# Altium PCB BeagleBone_RF_Cape_Rev_02.PcbDoc (part 1 of 2)
Units mil, origin at the board's own origin, x right, y up, seen from the top; angles counter-clockwise.
Board outline 3400 x 2150 mil, 4 copper layers (Top Layer, GND_PLANE, Mid-Layer 1, Bottom Layer), stack 61.6 mil thick; 114 components, 115 nets, 440 pads, 227 vias.
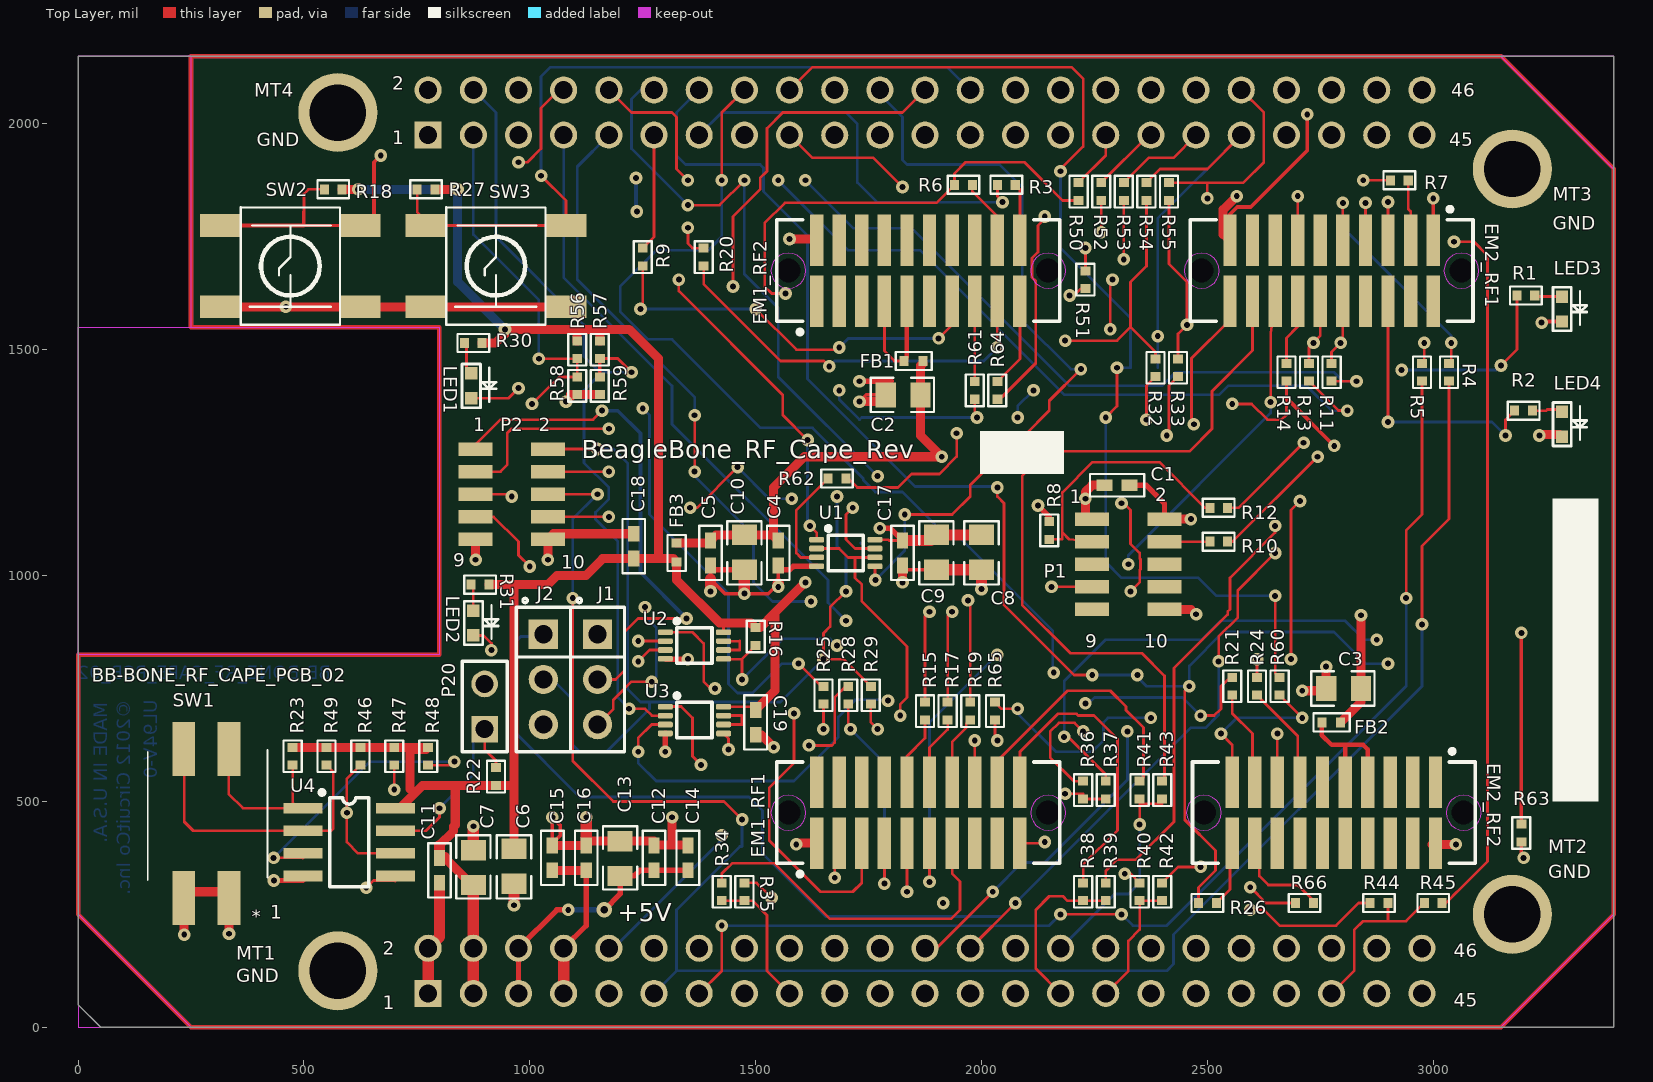
[diagram p0: Top Layer view]
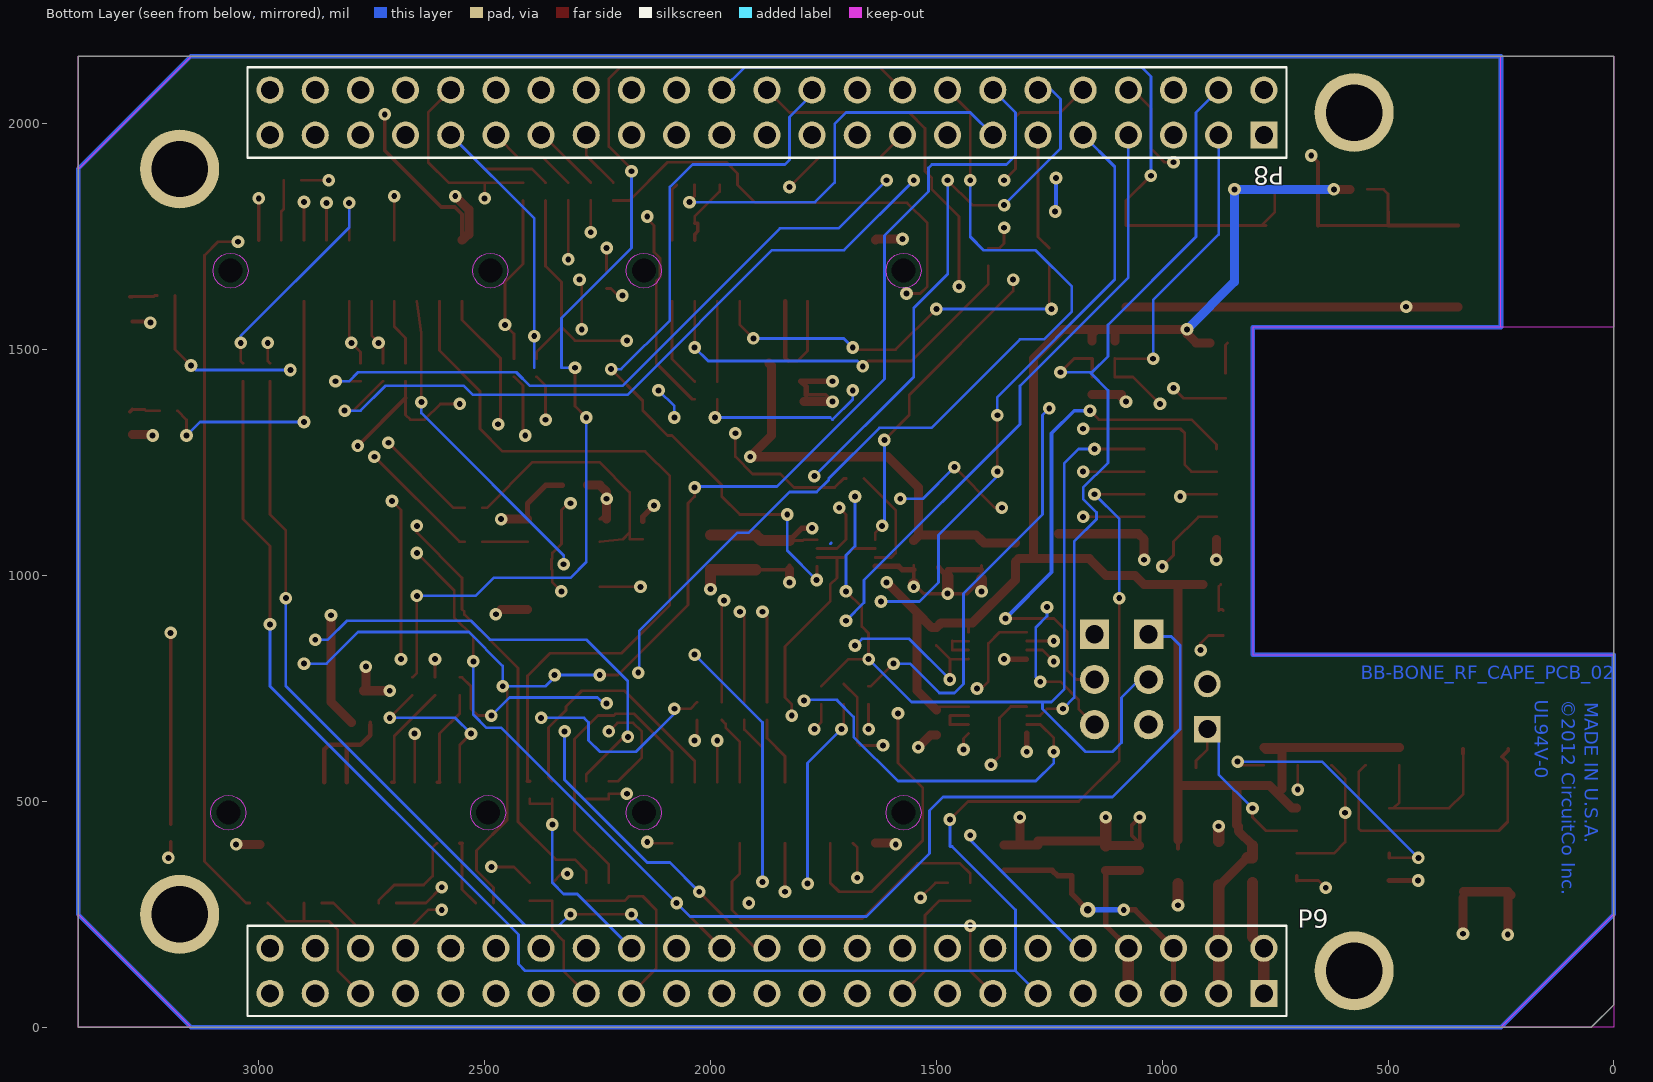
[diagram p1: Bottom Layer view, seen from below]
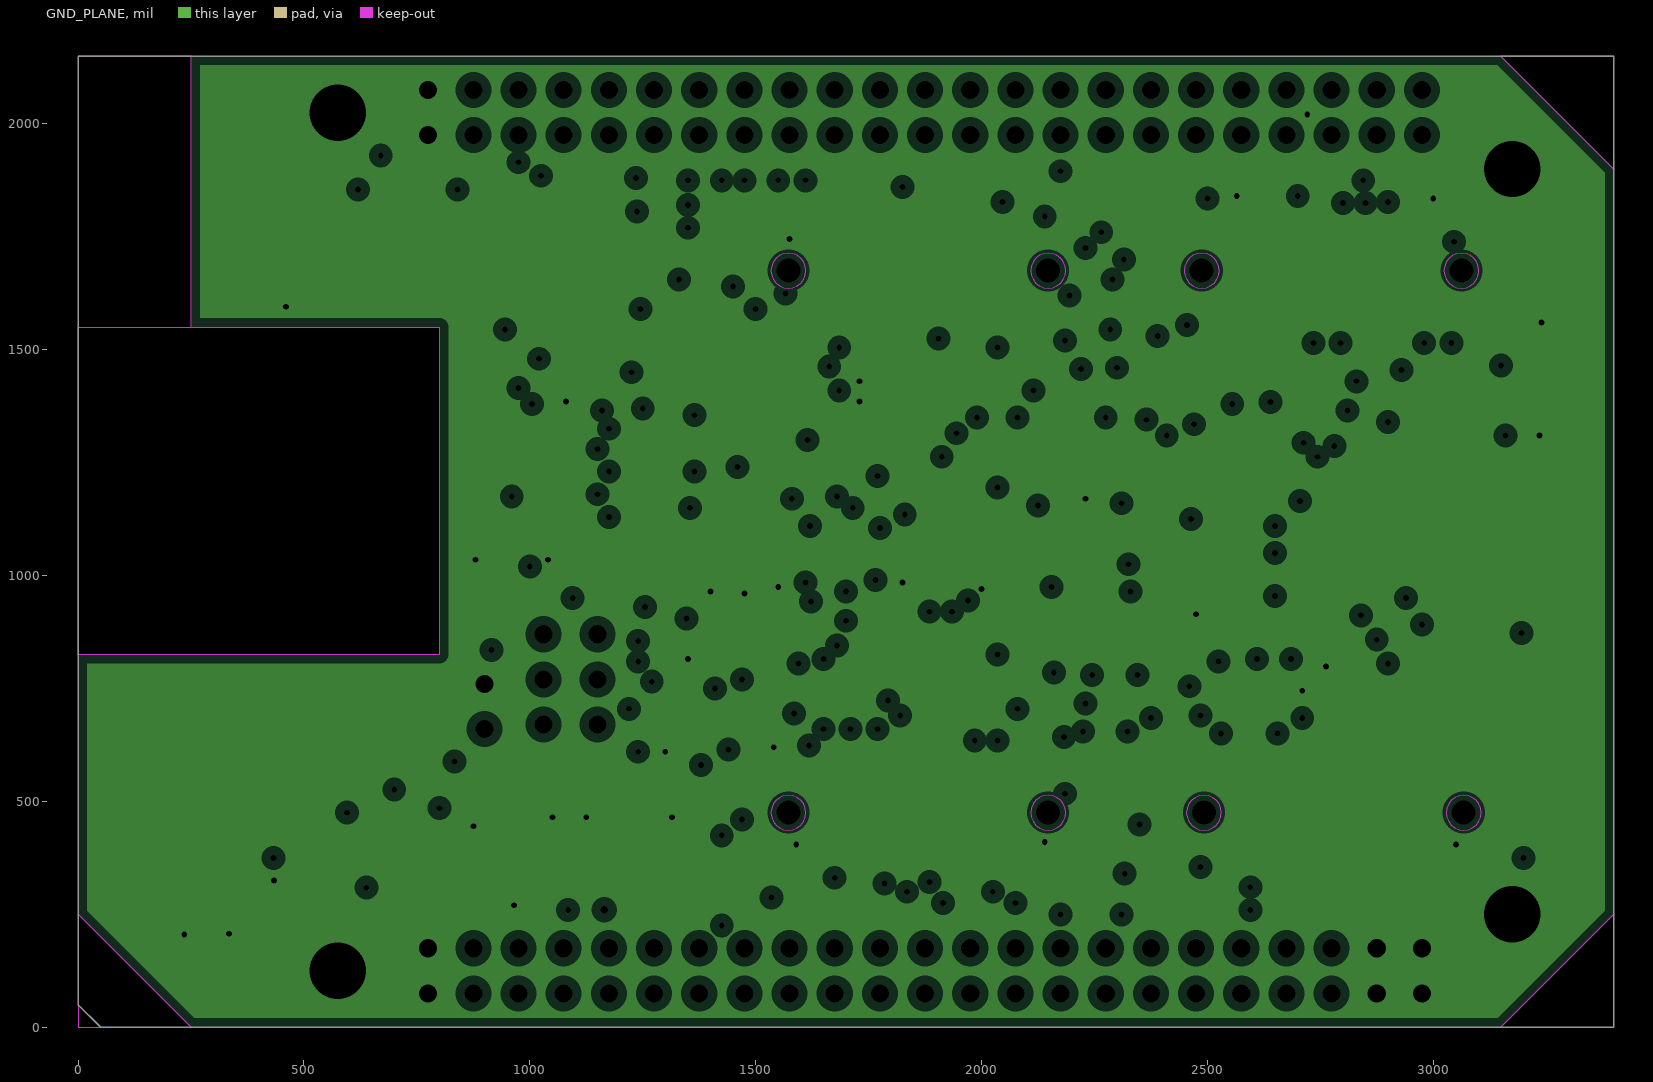
[diagram p2: GND_PLANE, clearances drawn from the general rule]
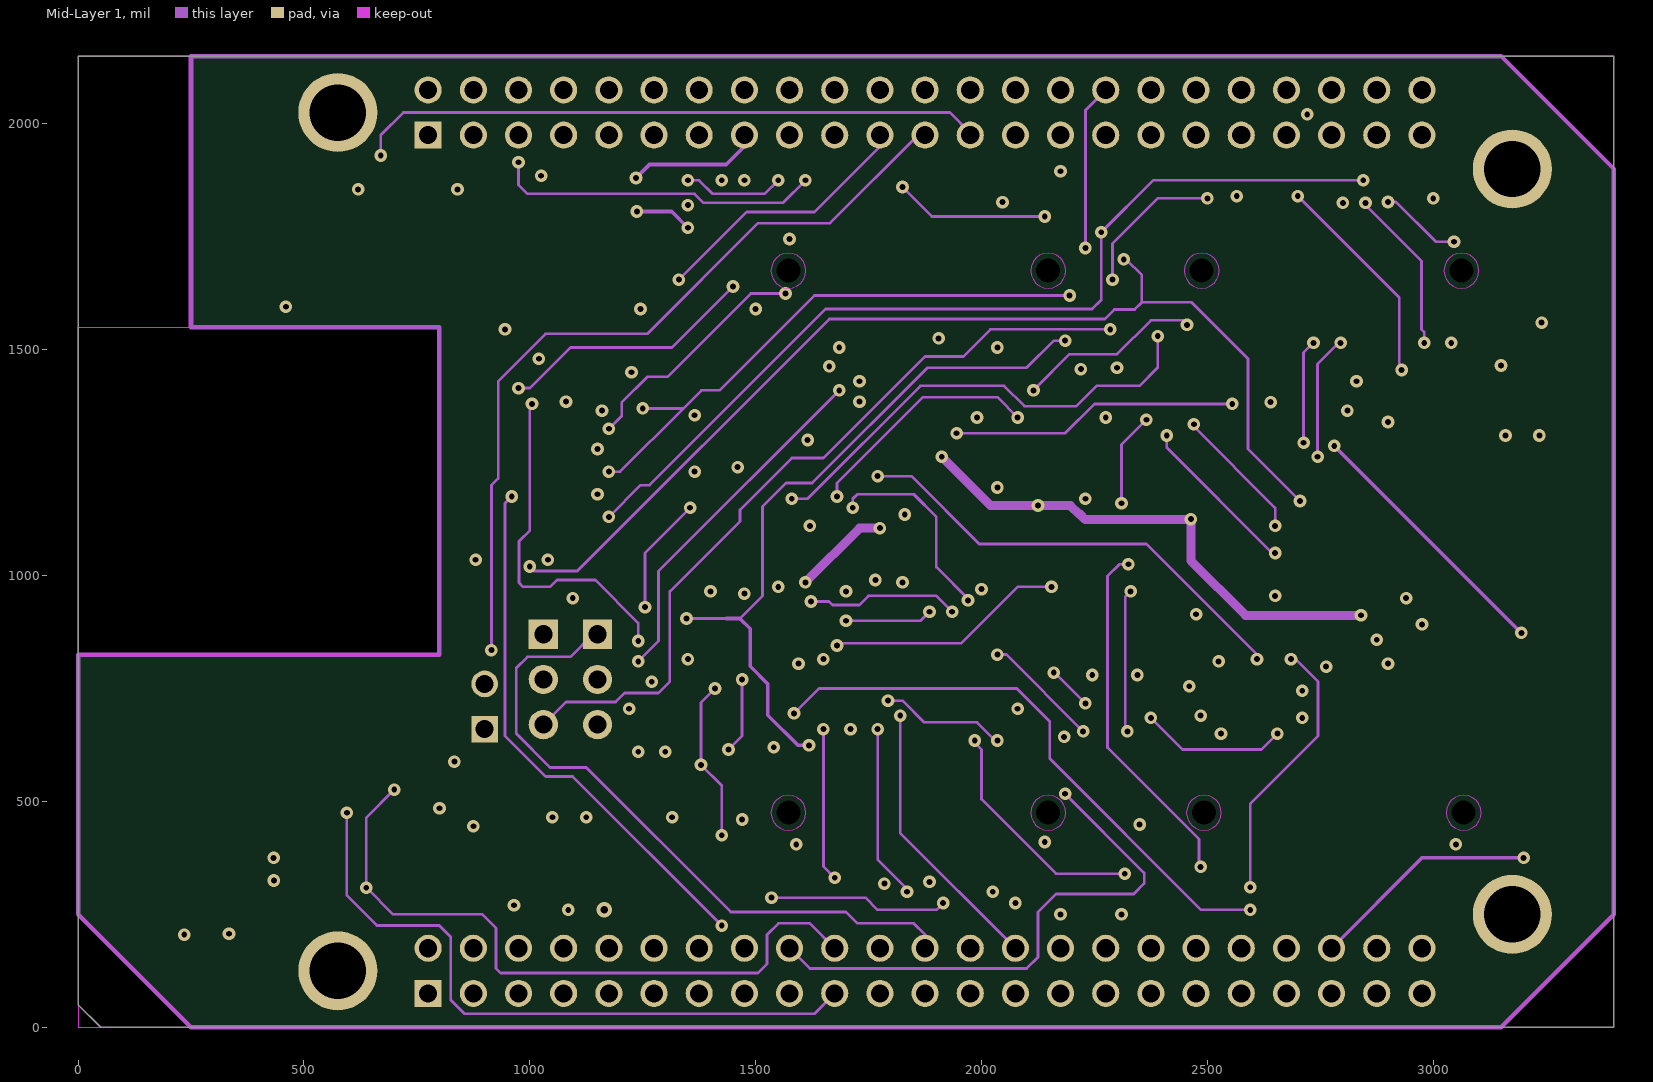
[diagram p3: Mid-Layer 1]

## Layer stack, top to bottom
Top Layer: signal copper 1.4
Dielectric: prepreg 18, FR-4, Dk 4.8
GND_PLANE: plane copper 1.4, net DGND
Dielectric: prepreg 20, FR-4, Dk 4.8
Mid-Layer 1: signal copper 1.4
Dielectric: core 18, FR-4, Dk 4.8
Bottom Layer: signal copper 1.4

## Board outline
0,2150 3400,2150 3400,0 50,0 0,50 0,2150
cut-out: 0,2150 0,1550 250,1550 250,2150
cut-out: 3400,2150 3150,2150 3400,1900
cut-out: 3400,0 3400,250 3150,0
cut-out: 0,0 250,0 0,250
cut-out: 0,1550 800,1550 800,825 0,825

## Design rules (kind name [scope] priority, off if disabled: settings)
Clearance [All] p1: gap=6
FanoutControl Fanout_SMT [IsSMTComponent] p1: bgadir=Out bgaviamode=Closest fanoutstyle=Rows fanoutdirection=OutOnly viagrid=1 // Fanout_BGA (Default Rule)
HoleSize [All] p1: absolutevalues=TRUE maxlimit=200 minlimit=10 maxpercent=80.000 minpercent=20.000
MinimumSolderMaskSliver [All] p1: minsoldermaskwidth=1
NetAntennae [All] p1: netantennaetolerance=5
PlaneClearance [All] p1: clearance=20
PlaneConnect [All] p1: planeconnectstyle=Direct reliefexpansion=20 reliefentries=4 reliefconductorwidth=10 reliefairgap=10
PolygonConnect [All] p1: connectstyle=Relief reliefconductorwidth=10 reliefentries=4 polygonreliefangle="90 Angle" airgapwidth=10
RoutingVias [All] p1: holewidth=13 width=28 viastyle="Through Hole" minholewidth=12 minwidth=24 maxholewidth=32 maxwidth=50
SilkToSilkClearance [All] p1: silktosilkclearance=0
SilkscreenOverComponentPads [All] p1: minsilkscreentomaskgap=0
SolderMaskExpansion [All] p1: expansion=4
Width [All] p1: maxlimit=50 minlimit=6 preferedwidth=8
20 further rules are at their usual default settings.

## Components (designator, comment, footprint, x,y, rotation, side; value= is the part's Value field where it differs from the comment)
C1 "10% X5R 0402" CC0402 2300,1200 r0 top
C2 "10V, X5R, 0805" CC0805 1825,1400 r180 top
C3 "10V, X5R, 0805" CC0805 2800,750 r180 top
C4 "10% X5R 0402" CC0402 1550,1050 r270 top
C5 "10% X5R 0402" CC0402 1400,1050 r270 top
C6 "10V, X5R, 0805" CC0805 965,355 r270 top
C7 "10V, X5R, 0805" CC0805 875,355 r90 top
C8 "10V, X5R, 0805" CC0805 2000,1050 r270 top
C9 "10V, X5R, 0805" CC0805 1900,1050 r270 top
C10 "10V, X5R, 0805" CC0805 1475,1050 r270 top
C11 "10% X5R 0402" CC0402 800,347.44 r270 top
C12 "10% X5R 0402" CC0402 1275,375 r90 top
C13 "10V, X5R, 0805" CC0805 1200,375 r90 top
C14 "10% X5R 0402" CC0402 1350,375 r90 top
C15 "10% X5R 0402" CC0402 1050,375 r90 top
C16 "10% X5R 0402" CC0402 1125,375 r90 top
C17 "10% X5R 0402" CC0402 1825,1050 r270 top
C18 "10% X5R 0402" CC0402 1230,1065 r90 top
C19 "10% X5R 0402" CC0402 1500,675 r270 top
EM1_RF1 "20POS 1.27MM GLD SMD" TFM-110-02-X-D-A 1860,475 r0 top locked
EM1_RF2 "20POS 1.27MM GLD SMD" TFM-110-02-X-D-A 1860,1675 r0 top locked
EM2_RF1 "20POS 1.27MM GLD SMD" TFM-110-02-X-D-A 2775,1675 r180 top locked
EM2_RF2 "20POS 1.27MM GLD SMD" TFM-110-02-X-D-A 2780,475 r180 top locked
FB1 "0402, 580mOHM, 300mA" "SMT IND 0402" 1850,1475 r0 top
FB2 "0402, 580mOHM, 300mA" "SMT IND 0402" 2775,675 r0 top
FB3 "0402, 580mOHM, 300mA" "SMT IND 0402" 1325,1050 r270 top
J1 "PBC03SAAN" PBC03SAAN 1150,770 r270 top
J2 "PBC03SAAN" PBC03SAAN 1030,770 r270 top
LED1 "Blue" LED-0603 870,1420 r270 top
LED2 "Blue" LED-0603 875,895 r270 top
LED3 "Red" LED-0603 3285,1590 r270 top
LED4 "Grn" LED-0603 3285,1335 r270 top
MT1 "GND" MTGH200C125D_PL 575,125 r0 top
MT2 "GND" MTGH200C125D_PL 3175,250 r0 top locked
MT3 "GND" MTGH200C125D_PL 3175,1900 r0 top locked
MT4 "GND" MTGH200C125D_PL 575,2025 r0 top
P1 "CC Debug" HEADER10P 2325,1025 r0 top
P2 "UARTS" HEADER10P 960,1180 r0 top
P8 "X23P .1  240/110 30AU" "HEADER23X2 - BOT_MOUNT" 1875,2025 r0 bottom locked
P9 "X23P .1  240/110 30AU" "HEADER23X2 - BOT_MOUNT" 1875,125 r0 bottom locked
P20 "Header 2" HDR1X2 900,660 r90 top
R1 "1/10W 1% 0402 SMD" RESC0402 3205,1620 r0 top
R2 "1/10W 1% 0402 SMD" RESC0402 3200,1365 r0 top
R3 "0402 Chip Res 5%" RESC0402 2055,1865 r180 top
R4 "0402 Chip Res 5%" RESC0402 3035,1450 r90 top
R5 "0402 Chip Res 5%" RESC0402 2975,1450 r90 top
R6 "0402 Chip Res 5%" RESC0402 1960,1865 r180 top
R7 "0402 Chip Res 5%" RESC0402 2925,1875 r0 top
R8 "1/10W 1% 0402 SMD" RESC0402 2150,1100 r270 top
R9 "0402 Chip Res 5%" RESC0402 1250,1705 r90 top
R10 "0402 Chip Res 5%" RESC0402 2525,1075 r180 top
R11 "0402 Chip Res 5%" RESC0402 2775,1450 r90 top
R12 "0402 Chip Res 5%" RESC0402 2525,1150 r180 top
R13 "0402 Chip Res 5%" RESC0402 2725,1450 r90 top
R14 "0402 Chip Res 5%" RESC0402 2675,1450 r90 top
R15 "0402 Chip Res 5%" RESC0402 1875,700 r90 top
R16 "1/10W 1% 0402 SMD" RESC0402 1500,865 r270 top
R17 "0402 Chip Res 5%" RESC0402 1925,700 r90 top
R18 "1/10W 1% 0402 SMD" RESC0402 565,1855 r0 top
R19 "0402 Chip Res 5%" RESC0402 1975,700 r90 top
R20 "0402 Chip Res 5%" RESC0402 1385,1705 r90 top
R21 "0402 Chip Res 5%" RESC0402 2555,755 r90 top
R22 "1/10W 1% 0402 SMD" RESC0402 925,555 r90 top
R23 "1/10W 1% 0402 SMD" RESC0402 475,600 r270 top
R24 "0402 Chip Res 5%" RESC0402 2610,755 r90 top
R25 "0402 Chip Res 5%" RESC0402 1650,735 r90 top
R26 "0402 Chip Res 5%" RESC0402 2500,275 r180 top
R27 "1/10W 1% 0402 SMD" RESC0402 770.32,1855 r0 top
R28 "0402 Chip Res 5%" RESC0402 1705,735 r90 top
R29 "0402 Chip Res 5%" RESC0402 1755,735 r90 top
R30 "1/10W 1% 0402 SMD" RESC0402 875,1515 r180 top
R31 "1/10W 1% 0402 SMD" RESC0402 890,980 r180 top
R32 "0402 Chip Res 5%" RESC0402 2385,1460 r270 top
R33 "0402 Chip Res 5%" RESC0402 2435,1460 r270 top
R34 "0402 Chip Res 5%" RESC0402 1425,300 r90 top
R35 "0402 Chip Res 5%" RESC0402 1475,300 r90 top
R36 "0402 Chip Res 5%" RESC0402 2225,525 r270 top
R37 "0402 Chip Res 5%" RESC0402 2275,525 r270 top
R38 "0402 Chip Res 5%" RESC0402 2225,300 r90 top
R39 "0402 Chip Res 5%" RESC0402 2275,300 r90 top
R40 "0402 Chip Res 5%" RESC0402 2350,300 r90 top
R41 "0402 Chip Res 5%" RESC0402 2350,525 r270 top
R42 "0402 Chip Res 5%" RESC0402 2400,300 r90 top
R43 "0402 Chip Res 5%" RESC0402 2400,525 r270 top
R44 "0402 Chip Res 5%" RESC0402 2880,275 r180 top
R45 "0402 Chip Res 5%" RESC0402 3000,275 r0 top
R46 "1/10W 1% 0402 SMD" RESC0402 625,600 r270 top
R47 "1/10W 1% 0402 SMD" RESC0402 700,600 r270 top
R48 "1/10W 1% 0402 SMD" RESC0402 775,600 r270 top
R49 "1/10W 1% 0402 SMD" RESC0402 550,600 r270 top
R50 "0402 Chip Res 5%" RESC0402 2215,1850 r270 top
R51 "0402 Chip Res 5%" RESC0402 2230,1655 r90 top
R52 "0402 Chip Res 5%" RESC0402 2265,1850 r270 top
R53 "0402 Chip Res 5%" RESC0402 2315,1850 r270 top
R54 "0402 Chip Res 5%" RESC0402 2365,1850 r270 top
R55 "0402 Chip Res 5%" RESC0402 2415,1850 r90 top
R56 "1/10W 1% 0402 SMD" RESC0402 1105,1500 r270 top
R57 "1/10W 1% 0402 SMD" RESC0402 1155,1500 r270 top
R58 "1/10W 1% 0402 SMD" RESC0402 1105,1420 r90 top
R59 "1/10W 1% 0402 SMD" RESC0402 1155,1420 r270 top
R60 "0402 Chip Res 5%" RESC0402 2660,755 r90 top
R61 "0402 Chip Res 5%" RESC0402 1985,1410 r270 top
R62 "0402 Chip Res 5%" RESC0402 1680,1215 r180 top
R63 "0402 Chip Res 5%" RESC0402 3195,430 r270 top
R64 "0402 Chip Res 5%" RESC0402 2035,1410 r270 top
R65 "0402 Chip Res 5%" RESC0402 2030,700 r270 top
R66 "0402 Chip Res 5%" RESC0402 2715,275 r180 top
SW1 "for I2C Address Selection on EEPROM" SM_CRY_SCC18 284.21,450.98 r180 top
SW2 "B3S-1100" SWITCH-OMRON-B3S-1000 470,1685 r180 top
SW3 "B3S-1100" SWITCH-OMRON-B3S-1000 925,1685 r180 top
U1 "GATE POS-AND DCU8" DCU-8 1700,1050 r270 top
U2 "GATE POS-AND DCU8" DCU-8 1365,845 r270 top
U3 "GATE POS-AND DCU8" DCU-8 1365,680 r270 top
U4 "56KBIT 400KHZ 8SOIC" SO8 600,410 r270 top

## Footprints (in the part's own frame and the unit in brackets; to place one, negate y for a bottom-side part, rotate by r counter-clockwise, add the part's x,y. Pads: shape width x height; smd on the part's side, far side on the other; paste and mask are expansions set on the pad)
CC0402 [mil] "Chip Capacitor, Body 1.0x0.5mm, IPC Low Density"
  rect 35x25 smd: 1(-27.56,0) 2(27.56,0)
  silkscreen extent -60,-25 60,25, body extent -22,-12 22,12, height 10
CC0805 [mil]
  rect 45x55 smd: 1(-40,0) 2(37,0)
  silkscreen extent -70,-38 70,38, body extent -45,-20 40,20, height 20
DCU-8 [mil] "Dual Little Logic"
  rrect50% 12.5x33 smd mask+1.5: 1(-29.53,-64.96) 2(-9.84,-64.96) 3(9.84,-64.96) 4(29.53,-64.96) 5(29.53,63.98) 6(9.84,63.98) 7(-9.84,63.98) 8(-29.53,63.98)
  silkscreen extent -59,-44 39,38, body extent -40,-42 40,43, height 40
HDR1X2 [mm] "Connector; Header; 2 Position"
  rect 1.5x1.5 hole 1.016: 1(0,0)
  round 1.5 hole 1.016: 2(2.54,0)
  silkscreen extent -1.27,-1.27 3.81,1.27
HEADER10P [mil] "CC Debugg 0.50LS Dual Row"
  rect 75x30 smd: 1(-80,100) 2(80,100) 3(-80,50) 4(80,50) 5(-80,0) 6(80,0) 7(-80,-50) 8(80,-50) 9(-80,-100) 10(80,-100)
  body extent -40,-125 40,125, height 200
"HEADER23X2 - BOT_MOUNT" [mil] "HEADER23X2"
  rect 60x60 hole 40: 1(-1100,50)
  round 60 hole 40: 2(-1100,-50) 3(-1000,50) 4(-1000,-50) 5(-900,50) 6(-900,-50) 7(-800,50) 8(-800,-50) 9(-700,50) 10(-700,-50) 11(-600,50) 12(-600,-50) 13(-500,50) 14(-500,-50) 15(-400,50) 16(-400,-50) 17(-300,50) 18(-300,-50) 19(-200,50) 20(-200,-50) 21(-100,50) 22(-100,-50) 23(0,50) 24(0,-50) 25(100,50) 26(100,-50) 27(200,50) 28(200,-50) 29(300,50) 30(300,-50) 31(400,50) 32(400,-50) 33(500,50) 34(500,-50) 35(600,50) 36(600,-50) 37(700,50) 38(700,-50) 39(800,50) 40(800,-50) 41(900,50) 42(900,-50) 43(1000,50) 44(1000,-50) 45(1100,50) 46(1100,-50)
  silkscreen extent -1150,-100 1150,100, body extent -1150,-100 1150,100, height 330
LED-0603 [mm]
  rect 0.7x0.7 smd: A(-0.7,0) K(0.7,0)
  silkscreen extent -1.22,-0.51 1.22,1.4, body extent -0.76,-0.38 0.76,0.38, height 0.76
MTGH200C125D_PL [mil]
  round 175 hole 125: 1(0,0)
PBC03SAAN [mm] "Sullins 100mil, 1x3, 230 mil above insulator"
  rect 1.65x1.65 hole 1.016: 1(-2.54,0)
  round 1.65 hole 1.016: 2(0,0) 3(2.54,0)
  silkscreen extent -4.57,-1.52 4.06,1.52, body extent -3.81,-1.27 3.81,1.27, height 8.38
RESC0402 [mil] "Chip Resistor, Body 1.1x0.5mm, IPC High Density"
  rect 20x22 smd: 1(-19.68,0) 2(19.69,0)
  silkscreen extent -35,-20 35,20, body extent -20,-10 20,10, height 10
SM_CRY_SCC18 [mil]
  rect 50x120 smd: 1(-50,165) 2(50,165) 3(50,-165) 4(-50,-165)
  silkscreen extent -135,-163 130,125, body extent -130,-125 130,115, height 162
"SMT IND 0402" [mil] "Chip Inductor, Body 1.0x0.5mm, IPC Medium Density"
  rect 20x22 smd: 1(-21.65,0) 2(20,0)
  silkscreen extent -40,-20 40,20, body extent -20,-10 20,10, height 10
SO8 [mm] "Small Outline; 8 Leads; Body Width 3.9 mm; Pitch 1.27 mm"
  rect 0.6x2.2 smd: 1(-1.905,-2.6) 2(-0.635,-2.6) 3(0.635,-2.6) 4(1.905,-2.6) 5(1.905,2.6) 6(0.635,2.6) 7(-0.635,2.6) 8(-1.905,2.6)
  silkscreen extent -2.92,-1.65 2.5,1.1, body extent -2.54,-1.27 2.54,1.27, height 0.76
SWITCH-OMRON-B3S-1000 [mil]
  rect 90x50 smd: 1(155,-90) 2(-155,-90) 3(155,90) 4(-155,90)
  silkscreen extent -110,-131 110,130, body extent -115,-135 115,135, height 79
TFM-110-02-X-D-A [mm] "1.27mm pitch, 20 pin, terminal strip; w/alignment pins, SMT"
  rect 0.75x2.9 smd mask+0: 1(-5.715,-1.714) 2(-5.715,1.714) 3(-4.445,-1.714) 4(-4.445,1.714) 5(-3.175,-1.714) 6(-3.175,1.714) 7(-1.905,-1.714) 8(-1.905,1.714) 9(-0.635,-1.714) 10(-0.635,1.714) 11(0.635,-1.714) 12(0.635,1.714) 13(1.905,-1.714) 14(1.905,1.714) 15(3.175,-1.714) 16(3.175,1.714) 17(4.445,-1.714) 18(4.445,1.714) 19(5.715,-1.714) 20(5.715,1.714)
  round 1 hole 1.35 unplated mask+0: 21(-7.302,0) 22(7.302,0)
  Keep-Out Layer pour cut-out: 8.286,0 8.253,0.255 8.154,0.492 7.998,0.695 7.794,0.852 7.557,0.95 7.303,0.983 7.048,0.95 6.811,0.852 6.607,0.695 6.451,0.492 6.353,0.255 6.319,0 6.353,-0.255 6.451,-0.492 6.607,-0.695 6.811,-0.852 7.048,-0.95 7.303,-0.983 7.557,-0.95 7.794,-0.852 7.998,-0.695 8.154,-0.492 8.253,-0.255
  Keep-Out Layer pour cut-out: -6.319,0 -6.353,0.255 -6.451,0.492 -6.607,0.695 -6.811,0.852 -7.048,0.95 -7.303,0.983 -7.557,0.95 -7.794,0.852 -7.998,0.695 -8.154,0.492 -8.253,0.255 -8.286,0 -8.253,-0.255 -8.154,-0.492 -7.998,-0.695 -7.794,-0.852 -7.557,-0.95 -7.303,-0.983 -7.048,-0.95 -6.811,-0.852 -6.607,-0.695 -6.451,-0.492 -6.353,-0.255
  silkscreen extent -7.95,-3.57 7.95,2.85, body extent -8.51,-3.68 8.51,3.68, height 6

## Part data
C1 C5 C12 C14 C15 C16 C17 C18 C19: library part LMK105BJ104KV-F, "CAP CER 0.1UF 10V 10% X5R 0402"
C2 C3 C6 C7 C8 C9 C10 C13: library part C0805C106K8PACTU, "CAP CER10UF, 10V, X5R, 0805"
C4 C11: library part LMK105BJ105KV-F, "CAP CER 1UF 10V 10% X5R 0402"
EM1_RF1 EM1_RF2 EM2_RF1 EM2_RF2: library part TFM-110-02-S-D-WT, "CONN HEADER 20POS 1.27MM GLD SMD"
FB1 FB2 FB3: library part BK1005HS102-T, "FERRITE BEAD, 0402, 580mOHM, 300mA"
J1 J2: "Header, TH, 100mil, 1x3, Gold plated, 230 mil above insulator"
LED1 LED2: library part LED-BLU-0603, "SMT LED 0603"
LED3: library part LED-RED-0603, "SMT LED 0603"
LED4: library part LED-GRN-0603, "SMT LED 0603"
MT1 MT2 MT3 MT4: library part MT_1P, "1P .125DIA"
P1 P2: library part "SMT Header 5x2", "SMT Header, 10-Pin, .050LS Dual row"
P8 P9: library part 10-89-7460, "Headers & Wire Housings HDR VT 2X23P .1  240/110 30AU"
P20: "Header, 2-Pin"
R1 R2 R30 R31: library part ERJ-2GEJ221X, "RES 220 OHM 1/10W 1% 0402 SMD"
R3 R4 R5 R6 R7 R9 R10 R11 R12 R13 R14 R15 R17 R19 R20 R21 R24 R25 R26 R28 R29 R32 R33 R34 R35 R36 R37 R38 R39 R40 R41 R42 R43 R44 R45 R50 R51 R52 R53 R54 R55 R60 R61 R62 R63 R64 R65 R66: library part ERJ-2GE0R00X, "RES 0.0 OHM 1/10W 0402 SMD"
R8 R16 R18 R22 R23 R27 R48 R49 R56 R57 R58 R59: library part ERJ-2RKF4701X, "RES 4.70K OHM 1/10W 1% 0402 SMD"
R46 R47: library part ERJ-2RKF1501X, "RES 1.50K OHM 1/10W 1% 0402 SMD"
SW1: library part SW_DIP_2P, "SMT 2Pos Slide Dip Switch"
SW2 SW3: library part SW-PB, "Switch, Tact 6mm SMT"
U1 U2 U3: library part IC_SN74AUP2G08_0, "IC GATE POS-AND DL 2INP LP 8US8"
U4: library part CAT24C256WI-G, "IC EEPROM 256KBIT 400KHZ 8SOIC"

## Via types
v1: diameter 28, hole 13, Top Layer to Bottom Layer, 226 vias
v2: diameter 35, hole 16, Top Layer to Bottom Layer, 1 vias

## Nets (pads, with @x,y where several pads share a name; then routed paths per layer and width w, separated by ;. In a path a pad name is that pad's centre, name@x,y a point inside that pad or via, vN(x,y) a via of type N, cw(c..) or ccw(c..) an arc to the next point about the centre after c; other vN are vias at no path point)
ADC_GND: P9.34
CC_DBUGGER_RESETN: P1.7 R16.2 U2.5 U3.5 | length 1208.8
  Top Layer w6: U3.5@1428.98,650.47 1440,639.45 v1(1440,615) ; U2.5@1428.98,815.47 1429.45,815 1470,815 ; v1(1470,770) 1470,815 ; R16.2@1500,845.31 1470,815.31 1470,815 ; v1(2155,975) P1.7@2245,975
  Mid-Layer 1 w6: v1(1440,615) 1470,645 v1(1470,770) ; v1(1680,845) 1685,850 1955,850 2080,975 v1(2155,975)
  Bottom Layer w6: v1(1470,770) 1560,860 1665,860 v1(1680,845)
CLKOUT2: P9.41 R44.1 R45.1 | length 381
  Top Layer w6: P9.41@2775,75 2825,125 2825,215 2845,235 2900,235 ; R44.1@2899.69,275 2899.69,235.31 2900,235 ; R45.1@2980.32,275 2980,275 2940,235 2900,235
DGND: C1.1 C2.2 C3.2 C4.2 C5.2 C6.2 C7.2 C8.2 C9.2 C10.2 C11.2 C12.2 C13.2 C14.2 C15.2 C16.2 C17.2 C18.2 C19.2 EM1_RF1.1 EM1_RF1.19 EM1_RF2.2 EM2_RF1.1 EM2_RF1.19 EM2_RF2.2 LED3.K LED4.K MT1.1 MT2.1 MT3.1 MT4.1 P1.1 P1.10 P2.9 P2.10 P8.1 P8.2 P9.1 P9.2 P9.43 P9.44 P9.45 P9.46 P20.2 R58.1 R59.2 SW1.1 SW1.2 SW2.3 SW2.4 SW3.3 SW3.4 U1.4 U2.4 U3.4 U4.4 | length 4787.6
  Top Layer w6: C12.2@1275,402.56 1275,403 C12.2@1275,412 ; U2.4@1300.04,815.47 U2.4@1300.51,815 ; C14.2@1350,402.56 C14.2@1350,403 ; C5.2@1400,1013 C5.2@1400,1022.44 ; C4.2@1550,1013 C4.2@1550,1022.44 ; v1(1590,405) v1@1592.5,407.5 ; EM1_RF1.19@2085,407.5 2137.5,407.5 v1(2140,410) ; P1.1@2230,1125 P1.1@2245,1125 2235,1135 2235,1170 v1(2230,1170) ; EM2_RF2.2@2997.5,405 EM2_RF2.2@3000,407.5 ; v1(3235,1310) v1@3237.44,1312.44 ; v1@3237.44,1562.44 3235,1560 v1(3240,1560)
  Top Layer w8: C15.2@1050,402.56 C15.2@1050,407 ; C5.2@1400,1013 1400,992 1432,960 v1(1475,960) 1528,960 1550,982 C4.2@1550,1013 ; v1(1730,1385) 1745,1400 C2.2@1788,1400 ; C17.2@1825,1022.44 1825,1013 C9.2@1900,1013 ; EM2_RF1.19@2550,1742.5 2550,1800 2566,1816 2596,1816 2721,1941 v1(2721,2021) ; v1(2710,745) 2715,750 C3.2@2763,750 ; EM2_RF1.1@3000,1742.5 v1(3000,1835) ; v1(3240,1560) 3242.44,1562.44 LED3.K@3280,1562.44 ; C15.2@1050,407 1067,424 1067,448 v1(1050,465) C15.2@1050,407
  Top Layer w12: v1(433.33,325) U4.4@497.64,325 ; v1(1300,610) 1300,650.43 U3.4@1300.04,650.47 ; U2.4@1300.51,815 v1(1350,815) ; C5.2@1400,1013 C10.2@1475,1013 ; C10.2@1475,998 C10.2@1495,1018 ; C4.2@1550,1013 1576,1013 1583.47,1020.47 U1.4@1635.04,1020.47 ; v1(1730,1430) 1800,1430 1788,1418 C2.2@1788,1400 ; 2464.2,925 v1(2475,914.2)
  Top Layer w20: SW1.2@227.59,292.59 235,300 SW1.1@333.42,300 ; SW1.2@234.21,285.98 235,285.19 v1(235,205) ; v1(334.21,206.98) SW1.1@334.21,285.98 ; SW2.3@345,1595 SW2.4@625,1595 SW3.3@766,1595 ; SW3.3@770,1595 SW3.4@1080,1595 ; v1(880,1035) P2.9@880,1080 ; v1(1040,1035) P2.10@1040,1080 1052.56,1092.56 C18.2@1230,1092.56 ; C15.2@1050,402 C16.2@1125,402 ; v1(1080,1385) 1090,1395 1090,1400.32 R58.1@1105,1400.32 1125,1400.32 R59.2@1155,1400.31 ; C16.2@1125,412 C13.2@1200,412 C12.2@1275,412 ; C12.2@1275,403 C14.2@1350,403 ; 1315,407 v1(1315,465) ; C19.2@1500,647.44 1512.56,647.44 v1(1540,620) ; v1(1575,1745) 1632.5,1745 EM1_RF2.2@1635,1742.5 ; v1@1592.5,407.5 EM1_RF1.1@1635,407.5 ; v1(1730,1385) C2.2@1793,1385 ; v1(1825,985) C17.2@1825,1013 ; P1.1@2230,1125 v1(2230,1170) 2230,1185 2245,1200 C1.1@2272.44,1200 ; P1.10@2405,925 2464.2,925 ; EM2_RF1.19@2550,1742.5 2537.5,1755 2535,1755 2535,1810 v1(2565,1840) ; v1(2710,745) C3.2@2768,745 ; C3.2@2763,750 v1(2763,798.5) ; EM2_RF2.2@2997.5,405 v1(3050,405) ; v1@3237.44,1312.44 LED4.K@3280,1312.44 ; v1@3237.44,1562.44 v1@3242.44,1562.44
  Top Layer w25: P9.1@775,75 P9.2@775,175 800,200 C11.2@800,319.88 ; C7.2@875,412 v1(875,445) ; v1(965,270) C6.2@965,318 ; C16.2@1125,402 C16.2@1125,402.56 1125,412 v1(1125,465) ; v1(1400,965) 1400,992 ; v1(1475,960) C10.2@1475,998 ; v1(1550,975) v1@1550,982 ; C9.2@1900,1013 C8.2@2000,1013 v1(2000,970)
  Mid-Layer 1 w6: v1(2230,1170) v1@2230,1175
  other v1: 460,1595
EM1_GPIO0: P8.7 R15.2 | length 1731.6
  Top Layer w6: R15.2@1875,719.69 1875,910 v1(1885,920)
  Mid-Layer 1 w6: v1(1700,900) 1865,900 v1(1885,920)
  Bottom Layer w6: P8.7@1075,1975 1075,1660 1315,1420 1315,1335 1660,990 1660,940 v1(1700,900)
EM1_GPIO1: P8.9 R17.2 | length 1868.5
  Top Layer w6: v1(1365,1230) v1(1365,1355) ; R17.2@1925,719.69 1925,910 v1(1935,920)
  Mid-Layer 1 w6: v1(1622.5,942.5) 1662.5,942.5 1670,935 1730,935 1750,955 1900,955 v1(1935,920)
  Bottom Layer w6: P8.9@1175,1975 1105,1905 1105,1655 1365,1395 v1(1365,1355) ; v1(1365,1230) 1365,1220 1495,1090 1495,985 1537.5,942.5 v1(1622.5,942.5)
EM1_GPIO2: P8.11 R9.2 | length 260.7
  Top Layer w6: R9.2@1250,1724.69 1275,1749.69 P8.11@1275,1975
EM1_GPIO3: P8.13 R3.2 | length 896.9
  Top Layer w6: R3.2@2035.31,1865 2035.31,1839.69 2045,1830 2045,1825 v1(2046.59,1826.59)
  Bottom Layer w6: P8.13@1375,1975 1425,2025 1700,2025 1725,2000 1725,1870 1768.41,1826.59 v1(2046.59,1826.59)
EM1_GPIO4: P8.15 R20.2 | length 571
  Top Layer w6: v1(1350,1770) 1350,1735 1360.31,1724.69 R20.2@1385,1724.69
  Mid-Layer 1 w8: v1(1235,1880) 1265,1910 1435,1910 1475,1950 P8.15@1475,1975 ; v1(1237,1806) 1314,1806 v1(1350,1770)
  Bottom Layer w8: v1(1235,1880) 1235,1808 v1(1237,1806)
EM1_GPIO5: P8.17 R64.2 | length 1104.6
  Top Layer w6: P8.17@1575,1975 1625,1925 1760,1925 v1(1825,1860) ; R64.2@2035,1390.31 2040.31,1390.31 2120,1470 2120,1652.19 2111.93,1660.26 2111.93,1702.81 2125,1715.89 2125,1775 2145,1795 v1(2140,1795)
  Mid-Layer 1 w6: v1(1825,1860) 1890,1795 v1(2140,1795)
EM1_I2C_SCL: EM1_RF1.13 R34.2 | length 771.3
  Top Layer w6: R34.2@1425,319.69 1425,340 1448,363 1542,363 1665,240 1932.5,240 1952.5,260 1952.5,322.5 1935,340 EM1_RF1.13@1935,407.5
EM1_I2C_SDA: EM1_RF1.11 R36.1 | length 1152.1
  Top Layer w6: v1(1885,322) EM1_RF1.11@1885,407.5 ; R36.1@2225,544.69 2204.31,544.69 2152,597 2152,654.37 2171.63,674 2206,674 v1(2225,655)
  Mid-Layer 1 w6: v1(2035,825) 2055,825 v1(2225,655)
  Bottom Layer w6: v1(1885,322) 1885,675 v1(2035,825)
EM1_LED: LED2.K P8.23 | length 1844.2
  Top Layer w6: LED2.K@865,867.44 897.56,867.44 915,850 v1(915,835)
  Mid-Layer 1 w6: v1(915,835) 915,1200 930,1215 930,1430 1035,1535 1260,1535 1505,1780 1665,1780 1860,1975 P8.23@1875,1975
EM1_PBUTTON: P8.25 R18.1 SW2.1 SW2.2 | length 2045
  Top Layer w6: R18.1@545.32,1855 510,1855 500,1845 500,1775 SW2.2@655,1775
  Top Layer w8: SW2.1@345,1775 500,1775 500,1805 ; 655,1805 655,1775 655,1915 v1(670,1930)
  Mid-Layer 1 w6: v1(670,1930) 670,1975 720,2025 1930,2025 1975,1980 P8.25@1975,1975
EM1_RSTN_A: P8.3 R56.2 R58.2 U2.2 | length 1627
  Top Layer w6: v1(1005,1380) 1064.69,1439.69 R58.2@1105,1439.69 R56.2@1105,1480.31 1104.69,1480 v1(1020,1480) ; v1(1240,855) 1299.88,855 U2.2@1300.04,854.84
  Mid-Layer 1 w6: v1(1005,1380) 1000,1375 1000,1100 976,1076 976,984 985,975 1045,975 1060,990 1145,990 1240,895 v1(1240,855)
  Bottom Layer w6: P8.3@875,1975 875,1755 1020,1610 v1(1020,1480)
EM1_RSTN_B: R61.2 U2.3 | length 1242.9
  Top Layer w6: v1(1240,810) 1265.16,835.16 U2.3@1300.04,835.16 ; R61.2@1985,1390.31 1985,1355 v1(1990,1350)
  Mid-Layer 1 w6: v1(1240,810) 1285,855 1285,1010 v1(1685,1410)
  Bottom Layer w6: v1(1685,1410) 1685,1390 1730,1345 1735,1350 v1(1990,1350)
EM1_SLOW_CLK: EM1_RF1.5 R44.2 | length 2236.1
  Top Layer w6: v1(1585,695) 1585,585 1530,530 1530,414 1644,300 1715,300 1735,320 EM1_RF1.5@1735,407.5 ; v1(2595,260) 2625,260 2660,225 2785,225 2835,275 R44.2@2860.31,275
  Mid-Layer 1 w6: v1(1585,695) 1640,750 2078,750 2151,677 2151,595 2486,260 v1(2595,260)
EM1_SPI_CLK: EM1_RF1.16 R40.2 | length 655.5
  Top Layer w6: EM1_RF1.16@1985,542.5 v1(1985,635) ; v1(2317,340) 2329.69,340 R40.2@2350,319.69
  Mid-Layer 1 w6: v1(1985,635) 1985,630 2000,615 2000,505 2165,340 v1(2317,340)
EM1_SPI_CSN: R19.2 U1.7 | length 827.9
  Top Layer w6: v1(1715,1150) 1700,1135 1700,1079.84 1720,1059.84 U1.7@1763.98,1059.84 ; v1(1970,945) 1974,945 1975,944 R19.2@1975,719.69
  Mid-Layer 1 w6: v1(1715,1150) 1715,1170 1725,1180 1850,1180 1900,1130 1900,1019 1974,945 v1(1970,945)
EM1_SPI_ENA: P8.21 U1.1 | length 1294
  Top Layer w6: v1(1330,1655) 1330,1630 1560,1400 1560,1355 v1(1615,1300) ; v1(1620,1110) 1635.04,1094.96 U1.1@1635.04,1079.53
  Mid-Layer 1 w6: v1(1330,1655) 1480,1805 1630,1805 1775,1950 P8.21@1775,1975
  Bottom Layer w6: v1(1615,1300) 1615,1115 v1(1620,1110)
EM1_SPI_MISO: EM1_RF1.20 R38.2 | length 691.3
  Top Layer w6: EM1_RF1.20@2085,542.5 2085,610 2169,694 2210,694 2214,690 2249,690 2301,638 2301,436 2225,360 R38.2@2225,319.69
EM1_SPI_MOSI: EM1_RF1.18 R41.1 | length 595.9
  Top Layer w6: EM1_RF1.18@2035,542.5 2035,590 2190,745 2285,745 2320,710 2320,701.82 2358.41,663.41 2358.41,553.09 R41.1@2350,544.69
EM1_UART_CTSN: P2.3 R6.2 R50.2 | length 1901.5
  Top Layer w6: P2.3@880,1230 935,1230 950,1245 950,1315 960,1325 v1(1175,1325) ; v1(1566,1624.43) 1535.57,1624.43 1520,1640 1520,1780 1565,1825 1900,1825 1940,1865 R6.2@1940.31,1865 1940.31,1889.69 1940,1890 1965,1915 2095,1915 2179.69,1830.31 R50.2@2215,1830.31
  Mid-Layer 1 w6: v1(1175,1325) 1203.74,1353.74 1203.74,1383.74 1260,1440 1305,1440 1489.43,1624.43 v1(1566,1624.43)
EM1_UART_RTSN: P2.4 R25.2 R51.1 | length 2430.9
  Top Layer w6: P2.4@1040,1230 v1(1175,1230) ; v1(1595,805) 1645.31,754.69 R25.2@1650,754.69 ; v1(2195,1620) 2195,1610 2220.32,1635.32 R51.1@2230,1635.32
  Mid-Layer 1 w6: v1(1175,1230) 1200,1230 1340,1370 ; v1(1250,1370) 1340,1370 ; v1(2195,1620) 2195,1610 2185,1620 1630,1620 1420,1410 1380,1410 1340,1370
  Bottom Layer w6: v1(1250,1370) 1265,1355 1265,1135 1440,960 1440,760 1460,740 1493.49,740 1558.49,805 v1(1595,805)
EM1_UART_RX: J2.2 P2.2 R29.2 R33.1 R55.1 | length 3486
  Top Layer w6: P2.2@1040,1280 v1(1150,1280) ; v1(1700,965) 1665,930 1665,887.32 1650,872.32 v1(1650,815) 1694.69,815 R29.2@1755,754.69 ; R55.1@2415,1830.32 2415,1690 2455,1650 v1(2455,1555) 2435,1535 R33.1@2435,1479.69
  Mid-Layer 1 w6: v1(1680,1175) 1680,1205 1870,1395 2035,1395 v1(2080,1350) ; v1@2120,1415 2195,1490 2300,1490 2375,1565 2445,1565 v1(2455,1555)
  Bottom Layer w6: J2.2@1030,770 1050,770 1090,730 1090,630 1110,610 1170,610 1265,705 1265,720 ; v1(1150,1280) 1185,1280 1217,1248 1217,748 1245,720 1265,720 ; v1(1650,815) 1555,720 1265,720 ; v1(1680,1175) 1680,1065 1700,1045 v1(1700,965) ; v1(2080,1350) 2080,1375 v1(2115,1410)
EM1_UART_TX: J1.2 P2.1 R28.2 R32.1 R54.2 | length 3495.9
  Top Layer w6: P2.1@880,1280 880,1290 935,1345 1140,1345 v1(1160,1365) ; J1.2@1150,770 1190,770 1210,790 1210,875 1240,905 v1(1347,905) ; v1(1618,624) 1669,624 1675,630 1675,730 R28.2@1705,760 ; v1(2185,1520) 2300,1520 2330,1550 ; R54.2@2365,1830.31 2365,1685 2330,1650 2330,1550 ; R32.1@2385,1479.69 2385,1495 2330,1550
  Mid-Layer 1 w6: v1(1347,905) 1410,905 1435,905 ; 1465,905 1515,955 1515,1152.5 1567.5,1205 1625,1205 1880,1460 2100,1460 2160,1520 v1(2185,1520)
  Mid-Layer 1 w8: 1435,905 1465,905 1488,882 1488,799 1527,760 1527,691 1594,624 v1(1618,624)
  Bottom Layer w8: v1(1160,1365) 1195,1365 1245,1315 1245,1007 v1(1347,905)
EM2_CC_DEBUG_CLK: P1.3 R8.2 R12.2 | length 601.1
  Top Layer w6: R8.2@2150,1080.31 2179,1080.31 2179,1095.31 ; P1.3@2245,1075 2194,1080.31 2179,1095.31 ; R12.2@2505.31,1150 2494.86,1150 2393.86,1251 2246,1251 2179,1184 2179,1095.31
EM2_CC_DEBUG_DATA: P1.4 R10.2 | length 100.3
  Top Layer w6: P1.4@2405,1075 R10.2@2505.31,1075
EM2_GPIO0: P8.8 R11.1 | length 2425.6
  Top Layer w6: v1(975,1915) 995,1915 1025,1945 1025,2035 1065,2075 P8.8@1075,2075 ; R11.1@2775,1430.32 2829.69,1430.32 v1(2830,1430)
  Mid-Layer 1 w6: v1(975,1915) 975,1865 995,1845 1365,1845 1385,1825 1560,1825 v1(1610,1875)
  Bottom Layer w6: v1(1610,1875) 1716.25,1768.75 1846.25,1768.75 2195,1420 2400,1420 2430,1450 2780,1450 2800,1430 v1(2830,1430)
EM2_GPIO1: P8.10 R13.1 | length 2150.2
  Top Layer w6: P8.10@1175,2075 1225,2025 1315,2025 1325,2015 1325,1900 v1(1350,1875) ; R13.1@2725,1430.32 2790,1365.32 ; 2790,1365 2790,1365.32 ; v1(2810,1365) 2809.69,1365.32 2790,1365.32
  Mid-Layer 1 w6: v1(1350,1875) 1375,1875 1405,1845 1520,1845 v1(1550,1875)
  Bottom Layer w6: v1(1550,1875) 1704.64,1720.36 1863.64,1720.36 2184,1400 2526,1400 2546,1420 2720,1420 2775,1365 v1(2810,1365)
EM2_GPIO2: P8.12 R24.2 | length 2324
  Top Layer w6: v1(1350,1820) 1420,1820 v1(1475,1875) ; R24.2@2610,774.69 v1(2610,815)
  Mid-Layer 1 w6: v1(1770,1220) 1845,1220 1995,1070 2365,1070 2610,825 v1(2610,815)
  Bottom Layer w6: P8.12@1275,2075 1245,2075 1225,2055 1225,1945 v1(1350,1820) ; v1(1475,1875) 1475,1667 1550,1592 1550,1440 v1(1770,1220)
EM2_GPIO3: P8.14 R26.2 | length 3225.7
  Top Layer w6: v1(2035,1195) 2035,1175 2050,1160 2050,935 2205,780 v1(2245,780) ; v1(2460,755) 2450,745 2450,512.65 2449.93,512.57 2449.93,459.44 2518.03,391.33 2518.03,346.97 2480.31,309.26 R26.2@2480.31,275
  Bottom Layer w6: P8.14@1375,2075 1325,2025 1325,1930 1345,1910 1510,1910 1517.5,1902.5 1517.5,1850 1615,1752.5 1615,1435 1853,1197 2033,1197 v1(2035,1195) ; v1(2245,780) v1@2340,780 ; v1(2345,780) v1@2340,780 ; v1(2900,805) 2850,805 2780,875 2535,875 2460,800 v1(2460,755) 2365,755 v1@2340,780
EM2_GPIO4: P8.16 R21.2 | length 2524.5
  Top Layer w6: v1@1425,1880 1425,2025 P8.16@1475,2075 ; v1(2485,690) 2515,690 2530,705 2530,755 2549.69,774.69 R21.2@2555,774.69
  Mid-Layer 1 w6: v1(2160,785) 2162,785 v1(2230,717)
  Bottom Layer w6: v1(1425,1875) 1425,1750 1395,1720 1280,1720 1200,1640 1200,1585 1262,1523 1315,1523 1511,1327 1626.18,1327 1738.18,1215 1738.18,1211.82 1765,1185 1825,1185 1915,1095 1940,1095 2158,877 2158,787 v1(2160,785) ; v1(2230,717) 2230,715 2235,715 2250,730 2445,730 v1(2485,690)
EM2_GPIO5: P8.18 R60.2 | length 2466.9
  Top Layer w6: P8.18@1575,2075 1625,2125 2200,2125 2225,2100 2225,1950 2175,1900 v1(2175,1895) ; v1(2275,1350) 2300,1375 v1(2300,1460) ; v1(2650,955) 2650,784.69 R60.2@2660,774.69
  Bottom Layer w6: v1(2175,1895) 2175,1725 2330,1570 2330,1460 v1(2300,1460) ; v1(2275,1350) 2275,1030 2310,995 2480,995 2520,955 v1(2650,955)
EM2_I2C_SCL: R35.2 | length 472.4
  Top Layer w6: R35.2@1475,319.69 1502.31,319.69 v1(1535,287)
  Mid-Layer 1 w6: v1(1535,287) 1743,287 1770,260 1900,260 v1(1915,275)
  Bottom Layer w6: v1(1915,275) v1@1916,276
EM2_I2C_SDA: R37.1 | length 1029.6
  Top Layer w6: v1(2183,643) 2192,643 2275,560 R37.1@2275,544.69
  Bottom Layer w6: v1(2183,643) 2183,766 2275,858 2488,858 2530,900 2805,900 2847,858 v1(2875,858)
EM2_LED: LED1.K P8.24 | length 1458.8
  Top Layer w6: LED1.K@860,1392.44 952.44,1392.44 v1(975,1415) ; v1(1450,1640) 1450,1795 1510,1855 1510,1880 1525,1895 1525,1990 1560,2025 1825,2025 P8.24@1875,2075
  Mid-Layer 1 w6: v1(975,1415) 1000,1415 1090,1505 1315,1505 v1(1450,1640)
EM2_PBUTTON: P8.26 R27.1 SW3.1 SW3.2 | length 1743.9
  Top Layer w6: R27.1@750.63,1855 750.63,1804.37 SW3.1@780,1775 ; SW3.1@770,1775 SW3.1@780,1775 ; v1(1025,1885) 1080,1830 SW3.2@1080,1775 SW3.1@780,1775 ; P8.26@1975,2065 P8.26@1975,2075
  Bottom Layer w6: v1(1025,1885) 1025,2105 1045,2125 1925,2125 P8.26@1975,2075
EM2_RSTN_A: P8.4 R57.2 R59.1 U3.2 | length 1848
  Top Layer w6: R57.2@1155,1480.31 1194.69,1480.31 v1(1225,1450) ; v1(1220,705) 1255,705 1270.16,689.84 U3.2@1300.04,689.84
  Top Layer w8: R59.1@1155,1439.69 R57.2@1155,1480.31
  Bottom Layer w6: P8.4@875,2075 925,2025 925,1750 1120,1555 1120,1485 1155,1450 1160,1450 ; v1(1220,705) 1195,730 1195,1075 1145.36,1124.64 1145.36,1140 1175,1169.64 1175,1194.64 1120,1249.64 1120,1410 1160,1450 ; v1(1225,1450) 1160,1450
EM2_RSTN_B: R65.2 U3.3 | length 1124.8
  Top Layer w6: v1(1240,610) 1240,640.16 1270,670.16 U3.3@1300.04,670.16 ; R65.2@2030,680.31 2030,640 v1(2035,635)
  Mid-Layer 1 w6: v1(1793,723) 1825.18,723 1873.18,675 1990,675 2030,635 v1(2035,635)
  Bottom Layer w6: v1(1240,610) 1240,585 1280,545 1585,545 1683,643 1683,687 1720,724 1720,725 1791,725 v1(1793,723)
EM2_SLOW_CLK: EM2_RF1.5 R45.2 | length 1862
  Top Layer w6: EM2_RF1.5@2900,1742.5 v1(2900,1827) ; R45.2@3019.69,275 3028,275 3033,280 ; v1(3046,1738.89) 3090,1738.89 3120,1708.89 3120,367 3033,280 ; 3053,300 3033,280
  Mid-Layer 1 w6: v1(2900,1827) 2917.79,1827 3005.89,1738.89 v1(3046,1738.89)
EM2_SPI_CLK: EM2_RF1.16 R42.2 | length 1606
  Top Layer w6: R42.2@2400,319.69 2435.31,355 v1(2485,355) ; v1(2640,1384) 2640,1537 EM2_RF1.16@2650,1607.5
  Mid-Layer 1 w6: v1(2325,1025) 2305,1025 2279,999 2279,619 2481.69,416.31 2481.69,351.69 v1(2485,355)
  Bottom Layer w6: v1(2325,1025) 2325,1045 2640,1360 v1(2640,1384)
EM2_SPI_CSN: R14.1 R62.1 R63.1 | length 2364.7
  Top Layer w6: R62.1@1699.69,1215 1705,1215 1725,1195 1815,1195 1845,1225 1906.53,1225 1945,1263.47 v1@1945,1325 ; v1(2555,1380) 2598,1380 2633,1345 2664.3,1345 2675,1355.7 2675,1393 R14.1@2675,1430.32
  Top Layer w8: 2675,1393 v1(2781,1287) ; R63.1@3195,449.69 v1(3195,873)
  Mid-Layer 1 w6: v1(1945,1315) v1@1945,1325 ; v1@1945,1320 1950,1315 2185,1315 2250,1380 v1(2555,1380)
  Mid-Layer 1 w8: v1(2781,1287) v1(3195,873)
EM2_SPI_CSN_A: P9.42 R63.2 | length 545.2
  Top Layer w8: R63.2@3195,410.31 3195,380 v1(3200,375)
  Mid-Layer 1 w8: P9.42@2775,175 2975,375 v1(3200,375)